# Altium PCB DriverBoard.PcbDoc
Units mil, origin at the board's own origin, x right, y up, seen from the top; angles counter-clockwise.
Board outline 6700 x 1400 mil, 2 copper layers (Top Layer, Bottom Layer); 83 components, 93 nets, 391 pads, 217 vias.
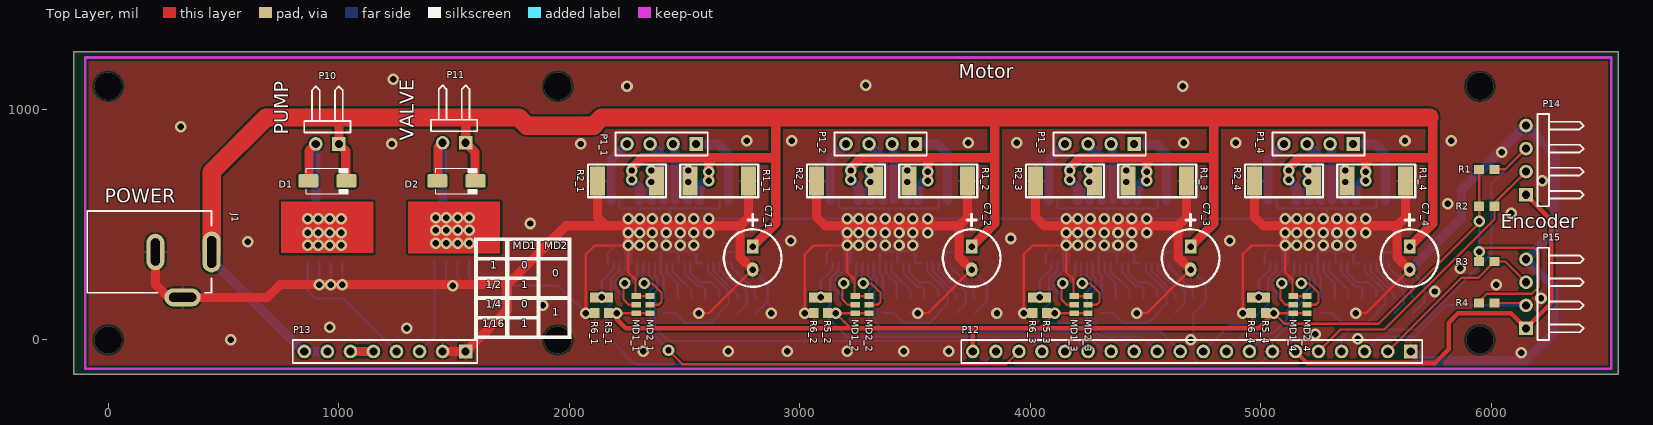
[diagram p0: Top Layer view]
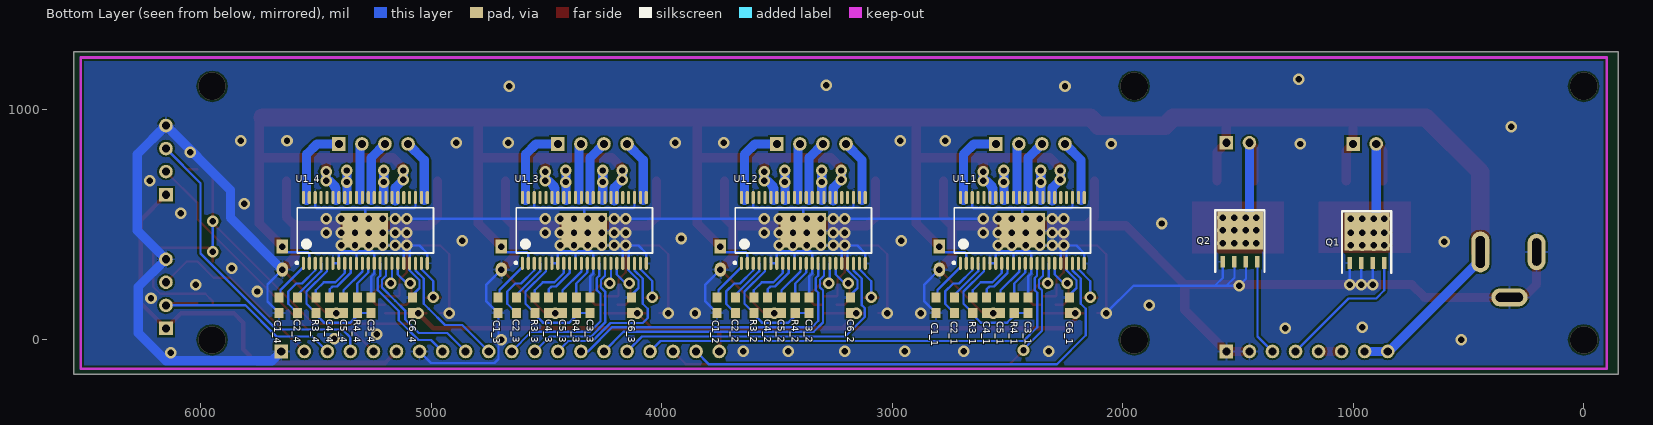
[diagram p1: Bottom Layer view, seen from below]
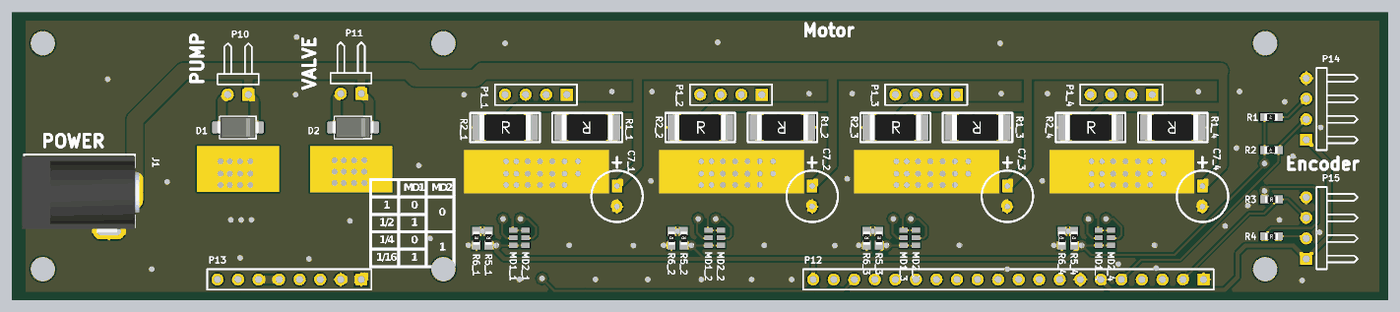
[diagram p2: 3D render of the assembled board from above, using the file's embedded part models]
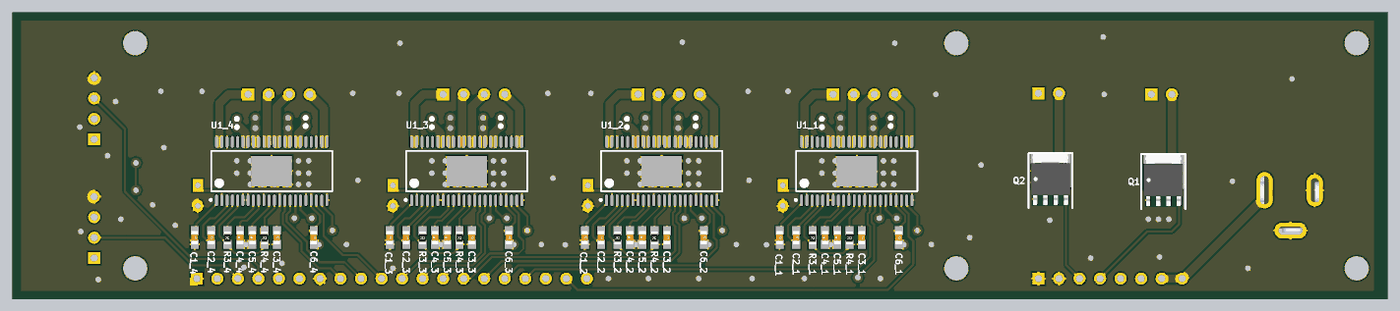
[diagram p3: 3D render of the assembled board from below, using the file's embedded part models]

## Layer stack, top to bottom
Top Layer: signal copper 1.4
Dielectric: dielectric 12.6, FR-4, Dk 4.8
Bottom Layer: signal copper 1.4

## Board outline
-150,1250 -150,-150 6550,-150 6550,1250

## Design rules (kind name [scope] priority, off if disabled: settings)
Clearance [All] p1: gap=8
HoleSize [All] p1: absolutevalues=TRUE maxlimit=196.85 minlimit=11.81 maxpercent=80.000 minpercent=20.000
MinimumSolderMaskSliver [All] p1: minsoldermaskwidth=0
PolygonConnect PolygonConnect_via [All vs IsVia] p1: connectstyle=Direct reliefconductorwidth=10 reliefentries=4 polygonreliefangle="90 Angle"
PolygonConnect [All] p2: connectstyle=Relief reliefconductorwidth=10 reliefentries=4 polygonreliefangle="90 Angle"
RoomDefinition Motor1 [InComponentClass('Motor1')] p1: confinementstyle=ConfineIn formatcopy=TRUE lockcomponents=FALSE outline 2035,65 2955,65 2955,955 2035,955
RoomDefinition Motor4 [InComponentClass('Motor4')] p2: confinementstyle=ConfineIn formatcopy=TRUE lockcomponents=FALSE outline 4885,65 5805,65 5805,955 4885,955
RoomDefinition Motor3 [InComponentClass('Motor3')] p3: confinementstyle=ConfineIn formatcopy=TRUE lockcomponents=FALSE outline 3935,65 4855,65 4855,955 3935,955
RoomDefinition Motor2 [InComponentClass('Motor2')] p4: confinementstyle=ConfineIn formatcopy=TRUE lockcomponents=FALSE outline 2985,65 3905,65 3905,955 2985,955
RoutingVias [All] p1: holewidth=16 width=24 viastyle="Through Hole" minholewidth=28 minwidth=50 maxholewidth=28 maxwidth=50
SilkToSilkClearance [All] p1: silktosilkclearance=0
SilkscreenOverComponentPads [All] p1: minsilkscreentomaskgap=0
SolderMaskExpansion [All] p1: expansion=4
Width [All] p1: maxlimit=100 minlimit=10 preferedwidth=10
24 further rules are at their usual default settings.

## Classes and differential pairs
net class M_STEP[1..4]: M_STEP1 M_STEP2 M_STEP3 M_STEP4
net class M_EN[1..4]: M_EN1 M_EN2 M_EN3 M_EN4
net class M_DIR[1..4]: M_DIR1 M_DIR2 M_DIR3 M_DIR4
component class DriverBoard: D1 D2 J1 P10 P11 P12 P13 P14 P15 Q1 Q2 R1 R2 R3 R4
channel class OneMotor: Motor1 Motor2 Motor3 Motor4
component class Motor4: C1_4 C2_4 C3_4 C4_4 C5_4 C6_4 C7_4 MD1_4 MD2_4 P1_4 R1_4 R2_4 R3_4 R4_4 R5_4 R6_4 U1_4
component class Motor3: C1_3 C2_3 C3_3 C4_3 C5_3 C6_3 C7_3 MD1_3 MD2_3 P1_3 R1_3 R2_3 R3_3 R4_3 R5_3 R6_3 U1_3
component class Motor2: C1_2 C2_2 C3_2 C4_2 C5_2 C6_2 C7_2 MD1_2 MD2_2 P1_2 R1_2 R2_2 R3_2 R4_2 R5_2 R6_2 U1_2
component class Motor1: C1_1 C2_1 C3_1 C4_1 C5_1 C6_1 C7_1 MD1_1 MD2_1 P1_1 R1_1 R2_1 R3_1 R4_1 R5_1 R6_1 U1_1

## Components (designator, comment, footprint, x,y, rotation, side; value= is the part's Value field where it differs from the comment)
C1_1 "Cap Semi" C-1608[0603] 2810,150 r270 bottom (schematic designator C1)
C1_2 "Cap Semi" C-1608[0603] 3760,150 r270 bottom (schematic designator C1)
C1_3 "Cap Semi" C-1608[0603] 4710,150 r270 bottom (schematic designator C1)
C1_4 "Cap Semi" C-1608[0603] 5660,150 r270 bottom (schematic designator C1)
C2_1 "Cap Semi" C-1608[0603] 2730,150 r270 bottom (schematic designator C2)
C2_2 "Cap Semi" C-1608[0603] 3680,150 r270 bottom (schematic designator C2)
C2_3 "Cap Semi" C-1608[0603] 4630,150 r270 bottom (schematic designator C2)
C2_4 "Cap Semi" C-1608[0603] 5580,150 r270 bottom (schematic designator C2)
C3_1 "Cap Semi" C-1608[0603] 2410,150 r270 bottom (schematic designator C3)
C3_2 "Cap Semi" C-1608[0603] 3360,150 r270 bottom (schematic designator C3)
C3_3 "Cap Semi" C-1608[0603] 4310,150 r270 bottom (schematic designator C3)
C3_4 "Cap Semi" C-1608[0603] 5260,150 r270 bottom (schematic designator C3)
C4_1 "Cap Semi" C-1608[0603] 2590,150 r90 bottom (schematic designator C4)
C4_2 "Cap Semi" C-1608[0603] 3540,150 r90 bottom (schematic designator C4)
C4_3 "Cap Semi" C-1608[0603] 4490,150 r90 bottom (schematic designator C4)
C4_4 "Cap Semi" C-1608[0603] 5440,150 r90 bottom (schematic designator C4)
C5_1 "Cap Semi" C-1608[0603] 2530,150 r90 bottom (schematic designator C5)
C5_2 "Cap Semi" C-1608[0603] 3480,150 r90 bottom (schematic designator C5)
C5_3 "Cap Semi" C-1608[0603] 4430,150 r90 bottom (schematic designator C5)
C5_4 "Cap Semi" C-1608[0603] 5380,150 r90 bottom (schematic designator C5)
C6_1 "Cap Semi" C-1608[0603] 2230,150 r270 bottom (schematic designator C6)
C6_2 "Cap Semi" C-1608[0603] 3180,150 r270 bottom (schematic designator C6)
C6_3 "Cap Semi" C-1608[0603] 4130,150 r270 bottom (schematic designator C6)
C6_4 "Cap Semi" C-1608[0603] 5080,150 r270 bottom (schematic designator C6)
C7_1 "50V" RB.1/.25 2795,355 r0 top (schematic designator C7)
C7_2 "50V" RB.1/.25 3745,355 r0 top (schematic designator C7)
C7_3 "50V" RB.1/.25 4695,355 r0 top (schematic designator C7)
C7_4 "50V" RB.1/.25 5645,355 r0 top (schematic designator C7)
D1 "1N5819" DO-214AC 950,690 r0 top
D2 "1N5819" DO-214AC 1510,690 r0 top
J1 "POWER" DC_POWER 200,380 r0 top
MD1_1 "Header 3" shortPad 2290,190 r270 top (schematic designator MD1)
MD1_2 "Header 3" shortPad 3240,190 r270 top (schematic designator MD1)
MD1_3 "Header 3" shortPad 4190,190 r270 top (schematic designator MD1)
MD1_4 "Header 3" shortPad 5140,190 r270 top (schematic designator MD1)
MD2_1 "Header 3" shortPad 2350,190 r270 top (schematic designator MD2)
MD2_2 "Header 3" shortPad 3300,190 r270 top (schematic designator MD2)
MD2_3 "Header 3" shortPad 4250,190 r270 top (schematic designator MD2)
MD2_4 "Header 3" shortPad 5200,190 r270 top (schematic designator MD2)
P1_1 "Motor" HDR1X4 2550,850 r180 top (schematic designator P1)
P1_2 "Motor" HDR1X4 3500,850 r180 top (schematic designator P1)
P1_3 "Motor" HDR1X4 4450,850 r180 top (schematic designator P1)
P1_4 "Motor" HDR1X4 5400,850 r180 top (schematic designator P1)
P10 "Pump" HDR1X2H 1000,850 r180 top
P11 "Valve" HDR1X2H 1550,855 r180 top
P12 "Header 20" HDR1X20 5650,-50 r180 top
P13 "Header 8" HDR1X8 1550,-50 r180 top
P14 "RotaryEncoder1" HDR1X4H 6150,630 r90 top
P15 "RotaryEncoder2" HDR1X4H 6150,50 r90 top
Q1 "PSMN7R0-30YL" SOT669 940,470 r180 bottom
Q2 "PSMN7R0-30YL" SOT669 1490,475 r180 bottom
R1 "Res Semi" R-1608[0603] 5980,740 r180 top
R1_1 "Res Semi" R-6332[2512] 2650,690 r180 top (schematic designator R1)
R1_2 "Res Semi" R-6332[2512] 3600,690 r180 top (schematic designator R1)
R1_3 "Res Semi" R-6332[2512] 4550,690 r180 top (schematic designator R1)
R1_4 "Res Semi" R-6332[2512] 5500,690 r180 top (schematic designator R1)
R2 "Res Semi" R-1608[0603] 5980,580 r180 top
R2_1 "Res Semi" R-6332[2512] 2250,690 r0 top (schematic designator R2)
R2_2 "Res Semi" R-6332[2512] 3200,690 r0 top (schematic designator R2)
R2_3 "Res Semi" R-6332[2512] 4150,690 r0 top (schematic designator R2)
R2_4 "Res Semi" R-6332[2512] 5100,690 r0 top (schematic designator R2)
R3 "Res Semi" R-1608[0603] 5980,340 r0 top
R3_1 "Res Semi" R-1608[0603] 2650,150 r270 bottom (schematic designator R3)
R3_2 "Res Semi" R-1608[0603] 3600,150 r270 bottom (schematic designator R3)
R3_3 "Res Semi" R-1608[0603] 4550,150 r270 bottom (schematic designator R3)
R3_4 "Res Semi" R-1608[0603] 5500,150 r270 bottom (schematic designator R3)
R4 "Res Semi" R-1608[0603] 5980,160 r0 top
R4_1 "Res Semi" R-1608[0603] 2470,150 r270 bottom (schematic designator R4)
R4_2 "Res Semi" R-1608[0603] 3420,150 r270 bottom (schematic designator R4)
R4_3 "Res Semi" R-1608[0603] 4370,150 r270 bottom (schematic designator R4)
R4_4 "Res Semi" R-1608[0603] 5320,150 r270 bottom (schematic designator R4)
R5_1 "Res Semi" R-1608[0603] 2170,150 r90 top (schematic designator R5)
R5_2 "Res Semi" R-1608[0603] 3120,150 r90 top (schematic designator R5)
R5_3 "Res Semi" R-1608[0603] 4070,150 r90 top (schematic designator R5)
R5_4 "Res Semi" R-1608[0603] 5020,150 r90 top (schematic designator R5)
R6_1 "Res Semi" R-1608[0603] 2110,150 r90 top (schematic designator R6)
R6_2 "Res Semi" R-1608[0603] 3060,150 r90 top (schematic designator R6)
R6_3 "Res Semi" R-1608[0603] 4010,150 r90 top (schematic designator R6)
R6_4 "Res Semi" R-1608[0603] 4960,150 r90 top (schematic designator R6)
U1_1 "LV8731" LV8731_V3 2435,475 r90 bottom (schematic designator U1)
U1_2 "LV8731" LV8731_V3 3385,475 r90 bottom (schematic designator U1)
U1_3 "LV8731" LV8731_V3 4335,475 r90 bottom (schematic designator U1)
U1_4 "LV8731" LV8731_V3 5285,475 r90 bottom (schematic designator U1)

## Footprints (in the part's own frame and the unit in brackets; to place one, negate y for a bottom-side part, rotate by r counter-clockwise, add the part's x,y. Pads: shape width x height; smd on the part's side, far side on the other; paste and mask are expansions set on the pad)
C-1608[0603] [mm] "Chip Capacitor; Body 1.6 x 0.8 mm (LxW typ)"
  rect 1.1x1 smd: 1(-0.85,0) 2(0.85,0)
  body extent -0.8,-0.42 0.8,0.38, height 0.29
DC_POWER [mm]
  oval 2x4.5 hole 1 slot 3.5 at 90 deg: 1(6.3,0.036)
  oval 2x4 hole 1 slot 3 at 90 deg: 2(0.1,0.036)
  oval 4x2 hole 1 slot 3 at 0 deg: 3(3.1,-4.964)
  silkscreen extent -7.4,-4.46 6.3,4.54, body extent -7.66,-5.17 6.84,4.33, height 11
DO-214AC [mm] "JEDEC DO214 variation AC. SMA"
  round 0.508 on Mech15: 0(0,0)
  rrect25% 2.2x1.5 smd: 1(-2.1,0) 2(2.1,0)
  silkscreen extent -2.3,-1.4 2.3,1.4, body extent -2.6,-1.3 2.6,1.3, height 2.42
HDR1X2H [mm] "Connector; Header; 2 Position; Right Angle"
  rect 1.5x1.5 hole 0.9: 1(0,0)
  round 1.5 hole 0.9: 2(2.54,0)
  silkscreen extent -1.27,-6.35 3.81,-1.27
HDR1X4 [mm] "Connector; Header; 4 Position"
  rect 1.5x1.5 hole 0.9: 1(0,0)
  round 1.5 hole 0.9: 2(2.54,0) 3(5.08,0) 4(7.62,0)
  silkscreen extent -1.27,-1.27 8.89,1.27
HDR1X4H [mm] "Connector; Header; 4 Position; Right Angle"
  rect 1.5x1.5 hole 0.9: 1(0,0)
  round 1.5 hole 0.9: 2(2.54,0) 3(5.08,0) 4(7.62,0)
  silkscreen extent -1.27,-6.35 8.89,-1.27
HDR1X8 [mm] "Connector; Header; 8 Position"
  rect 1.5x1.5 hole 0.9: 1(0,0)
  round 1.5 hole 0.9: 2(2.54,0) 3(5.08,0) 4(7.62,0) 5(10.16,0) 6(12.7,0) 7(15.24,0) 8(17.78,0)
  silkscreen extent -1.27,-1.27 19.05,1.27
HDR1X20 [mm] "Connector; Header; 20 Position"
  rect 1.5x1.5 hole 0.9: 1(0,0)
  round 1.5 hole 0.9: 2(2.54,0) 3(5.08,0) 4(7.62,0) 5(10.16,0) 6(12.7,0) 7(15.24,0) 8(17.78,0) 9(20.32,0) 10(22.86,0) 11(25.4,0) 12(27.94,0) 13(30.48,0) 14(33.02,0) 15(35.56,0) 16(38.1,0) 17(40.64,0) 18(43.18,0) 19(45.72,0) 20(48.26,0)
  silkscreen extent -1.27,-1.27 49.53,1.27
LV8731_V3 [mm] "SOP, 44-Leads, Body 15.0x5.6mm (max), Pitch 0.65mm, IPC Medium Density"
  oval 1.45x0.35 smd: 1(-3.625,6.825) 2(-3.625,6.175) 3(-3.625,5.525) 4(-3.625,4.875) 5(-3.625,4.225) 6(-3.625,3.575) 7(-3.625,2.925) 8(-3.625,2.275) 9(-3.625,1.625) 10(-3.625,0.975) 11(-3.625,0.325) 12(-3.625,-0.325) 13(-3.625,-0.975) 14(-3.625,-1.625) 15(-3.625,-2.275) 16(-3.625,-2.925) 17(-3.625,-3.575) 18(-3.625,-4.225) 19(-3.625,-4.875) 20(-3.625,-5.525) 21(-3.625,-6.175) 22(-3.625,-6.825) 23(3.625,-6.825) 24(3.625,-6.175) 25(3.625,-5.525) 26(3.625,-4.875) 27(3.625,-4.225) 28(3.625,-3.575) 29(3.625,-2.925) 30(3.625,-2.275) 31(3.625,-1.625) 32(3.625,-0.975) 33(3.625,-0.325) 34(3.625,0.325) 35(3.625,0.975) 36(3.625,1.625) 37(3.625,2.275) 38(3.625,2.925) 39(3.625,3.575) 40(3.625,4.225) 41(3.625,4.875) 42(3.625,5.525) 43(3.625,6.175) 44(3.625,6.825)
  rect 3.8x5 smd: 45(0,0)
  silkscreen extent -3.7,-7.5 2.5,7.68, body extent -2.8,-7.5 2.8,7.5, height 1.7
R-1608[0603] [mm] "Chip Resistor; Body 1.6 x 0.8 mm (LxW typ)"
  rect 1.1x1 smd: 1(-0.85,0) 2(0.85,0)
  body extent -1.27,-0.51 1.33,0.49, height 0.48
R-6332[2512] [mm] "贴片电阻2512 size6.35*3.2mm"
  rect 1.65x3.2 smd: 1(-3.24,0) 2(3.24,0)
  silkscreen extent -4.3,-1.8 4.3,1.8, body extent -3.4,-1.65 3.4,1.65, height 0.6
RB.1/.25 [mil]
  rect 50x62 hole 28: 1(0,50)
  oval 50x62 hole 28: 2(0,-50)
  silkscreen extent -125,-125 125,190
shortPad [mil] "short pad"
  rect 25x40 smd: 1(0,0) 2(37,0) 3(74,0)
SOT669 [mm] "PSMN7R0-30YL  NMOS"
  rect 0.5x1.3 smd: 1(1.905,-3.45) 3(-1.905,-3.45) 3(-0.635,-3.45) 3(0.635,-3.45)
  rect 5x4.2 smd: 2(0,0)
  silkscreen extent -2.75,-4.56 2.67,2.23, body extent -2.49,-4.23 2.41,2.2, height 1.15

## Part data
C1_1 C1_2 C1_3 C1_4 C2_1 C2_2 C2_3 C2_4 C3_1 C3_2 C3_3 C3_4 C4_1 C4_2 C4_3 C4_4 C5_1 C5_2 C5_3 C5_4 C6_1 C6_2 C6_3 C6_4: "Capacitor (Semiconductor SIM Model)"
C7_1 C7_2 C7_3 C7_4: library part "Cap Pol1", "Polarized Capacitor (Radial)"
D1 D2: library part "D Schottky", "Schottky Diode"
J1: library part POWER2.5
MD1_1 MD1_2 MD1_3 MD1_4 MD2_1 MD2_2 MD2_3 MD2_4: "Header, 3-Pin"
P1_1 P1_2 P1_3 P1_4: library part "Header 4", "Header, 4-Pin"
P10 P11: library part "Header 2H", "Header, 2-Pin, Right Angle"
P12: "Header, 20-Pin"
P13: "Header, 8-Pin"
P14 P15: library part "Header 4H", "Header, 4-Pin, Right Angle"
Q1 Q2: library part NMOS-2, "N-Channel Power MOSFET"
R1 R1_1 R1_2 R1_3 R1_4 R2 R2_1 R2_2 R2_3 R2_4 R3 R3_1 R3_2 R3_3 R3_4 R4 R4_1 R4_2 R4_3 R4_4 R5_1 R5_2 R5_3 R5_4 R6_1 R6_2 R6_3 R6_4: "Semiconductor Resistor"

## Via types
v1: diameter 50, hole 28, Top Layer to Bottom Layer, tented both sides, 211 vias
v2: diameter 118.11, hole 118.11, Top Layer to Bottom Layer, 6 vias

## Nets (pads, with @x,y where several pads share a name; then routed paths per layer and width w, separated by ;. In a path a pad name is that pad's centre, name@x,y a point inside that pad or via, vN(x,y) a via of type N, cw(c..) or ccw(c..) an arc to the next point about the centre after c; other vN are vias at no path point)
EMO_1: R3_1.1 U1_1.8 | length 225.1
  Bottom Layer w10: U1_1.8 2524.57,290.43 2565,250 2615,250 2650,215 R3_1.1@2650,188.46
EMO_2: R3_2.1 U1_2.8 | length 225.1
  Bottom Layer w10: U1_2.8 3474.57,290.43 3515,250 3565,250 3600,215 R3_2.1@3600,188.46
EMO_3: R3_3.1 U1_3.8 | length 225.1
  Bottom Layer w10: U1_3.8 4424.57,290.43 4465,250 4515,250 4550,215 R3_3.1@4550,188.46
EMO_4: R3_4.1 U1_4.8 | length 225.1
  Bottom Layer w10: U1_4.8 5374.57,290.43 5415,250 5465,250 5500,215 R3_4.1@5500,188.46
GND: C1_1.2 C1_2.2 C1_3.2 C1_4.2 C3_1.1 C3_2.1 C3_3.1 C3_4.1 C4_1.1 C4_2.1 C4_3.1 C4_4.1 C5_1.1 C5_2.1 C5_3.1 C5_4.1 C6_1.1 C6_2.1 C6_3.1 C6_4.1 C7_1.2 C7_2.2 C7_3.2 C7_4.2 J1.2 J1.3 MD1_1.1 MD1_2.1 MD1_3.1 MD1_4.1 MD2_1.1 MD2_2.1 MD2_3.1 MD2_4.1 P12.1 P12.7 P13.1 P13.2 P14.4 P15.4 Q1.3 Q2.3 R1_1.1 R1_2.1 R1_3.1 R1_4.1 R2_1.1 R2_2.1 R2_3.1 R2_4.1 R6_1.1 R6_2.1 R6_3.1 R6_4.1 U1_1.6 U1_1.7 U1_1.10 U1_1.13 U1_1.18 U1_1.19 U1_1.22 U1_1.25 U1_1.42 U1_1.45 U1_2.6 U1_2.7 U1_2.10 U1_2.13 U1_2.18 U1_2.19 U1_2.22 U1_2.25 U1_2.42 U1_2.45 U1_3.6 U1_3.7 U1_3.10 U1_3.13 U1_3.18 U1_3.19 U1_3.22 U1_3.25 U1_3.42 U1_3.45 U1_4.6 U1_4.7 U1_4.10 U1_4.13 U1_4.18 U1_4.19 U1_4.22 U1_4.25 U1_4.42 U1_4.45 | length 27032.1
  Top Layer w10: R6_1.1 v1(2071.54,116.54) 2071.54,371.54 2110,410 v1(2255,410) 2255,293.74 2287,261.74 2287,193 MD1_1.1 MD2_1.1 ; v1(2561.54,116.54) 2606.54,116.54 C7_1.2 ; R6_2.1 v1(3021.54,116.54) 3021.54,371.54 3060,410 v1(3205,410) 3205,293.74 3237,261.74 3237,193 MD1_2.1 MD2_2.1 ; v1(3511.54,116.54) 3556.54,116.54 C7_2.2 ; R6_3.1 v1(3971.54,116.54) 3971.54,371.54 4010,410 v1(4155,410) 4155,293.74 4187,261.74 4187,193 MD1_3.1 MD2_3.1 ; v1(4461.54,116.54) 4506.54,116.54 C7_3.2 ; R6_4.1 v1(4921.54,116.54) 4921.54,371.54 4960,410 v1(5105,410) 5105,293.74 5137,261.74 5137,193 MD1_4.1 MD2_4.1 ; v1(5411.54,116.54) 5456.54,116.54 C7_4.2
  Top Layer w40: J1.2 203.95,241.05 260.43,184.57 689.57,184.57 745,240 v1(915,240) 1730,240 ; P13.2 P13.1 1730,130 1730,240 ; R2_1.1 2122.44,532.44 2159.88,495 ; v1(2255,410) 2255,495 ; R1_1.1 2777.56,532.56 2740,495 ; C7_1.2 2740,360 2740,495 ; R2_2.1 3072.44,532.44 3109.88,495 3205,495 ; v1(3205,410) 3205,495 ; R1_2.1 3727.56,532.56 3690,495 ; C7_2.2 3690,360 3690,495 ; R2_3.1 4022.44,532.44 4059.88,495 4155,495 ; v1(4155,410) 4155,495 ; R1_3.1 4677.56,532.56 4640,495 ; C7_3.2 4640,360 4640,495 ; R2_4.1 4972.44,532.44 5009.88,495 5105,495 ; v1(5105,410) 5105,495 ; R1_4.1 5627.56,532.56 5590,495 ; C7_4.2 5590,360 5590,495 ; 1730,240 1985,495 2159.88,495 ; 2159.88,495 2255,495 ; 2255,495 2740,495 ; 3205,495 3690,495 ; 4155,495 4640,495 ; 5105,495 5590,495
  Bottom Layer w10: v1(915,240) Q1.3@915,334.17 ; v1(965,240) Q1.3@965,334.17 ; v1(1015,240) Q1.3@1015,334.17 ; Q2.3@1465,339.17 1465,265 v1(1495,235) 1953.07,235 v1(2071.54,116.54) ; Q2.3@1515,339.17 1515,270 1550,235 ; Q2.3@1565,339.17 1565,270 1600,235 ; U1_1.22 2166.3,376.3 2200,410 v1(2255,410) 2370,410 U1_1.45 ; U1_1.25 2217.48,577.52 2225,570 2435,570 ; C6_1.1 2230,195 2200,225 2200,258.74 2245,303.74 U1_1.19@2245,318.95 ; U1_1.19 v1@2243.07,398.07 ; U1_1.18 v1@2268.66,396.34 ; C3_1.1 2410,275 2396.61,288.39 U1_1.13 2396.61,376.61 2405,385 2430,385 ; U1_1.10 2473.39,371.61 ; C5_1.1 v1(2561.54,116.54) C4_1.1 ; U1_1.6 U1_1.7 2550.16,369.84 2535,385 2486.77,385 2473.39,371.61 ; v1(2605,525) v1(3205,525) ; U1_1.42 2652.52,577.52 2645,570 2435,570 ; C7_1.2 2860,240 2860,166.54 C1_1.2 ; U1_2.22 3116.3,376.3 3150,410 v1(3205,410) 3320,410 U1_2.45 ; U1_2.25 3167.48,577.52 3175,570 3385,570 ; C6_2.1 3180,195 3150,225 3150,258.74 3195,303.74 U1_2.19@3195,318.95 ; U1_2.19 v1@3193.07,398.07 ; U1_2.18 v1@3218.66,396.34 ; C3_2.1 3360,275 3346.61,288.39 U1_2.13 3346.61,376.61 3355,385 3380,385 ; U1_2.10 3423.39,371.61 ; C5_2.1 v1(3511.54,116.54) C4_2.1 ; U1_2.6 U1_2.7 3500.16,369.84 3485,385 3436.77,385 3423.39,371.61 ; v1(3555,525) v1(4155,525) ; U1_2.42 3602.52,577.52 3595,570 3385,570 ; C7_2.2 3810,240 3810,166.54 C1_2.2 ; U1_3.22 4066.3,376.3 4100,410 v1(4155,410) 4270,410 U1_3.45 ; U1_3.25 4117.48,577.52 4125,570 4335,570 ; C6_3.1 4130,195 4100,225 4100,258.74 4145,303.74 U1_3.19@4145,318.95 ; U1_3.19 v1@4143.07,398.07 ; U1_3.18 v1@4168.66,396.34 ; C3_3.1 4310,275 4296.61,288.39 U1_3.13 4296.61,376.61 4305,385 4330,385 ; U1_3.10 4373.39,371.61 ; C5_3.1 v1(4461.54,116.54) C4_3.1 ; U1_3.6 U1_3.7 4450.16,369.84 4435,385 4386.77,385 4373.39,371.61 ; v1(4505,525) v1(5105,525) ; U1_3.42 4552.52,577.52 4545,570 4335,570 ; C7_3.2 4760,240 4760,166.54 C1_3.2 4707.47,114.01 4707.47,-82.47 4725,-100 5000,-100 P12.7 ; U1_4.22 5016.3,376.3 5050,410 v1(5105,410) 5220,410 U1_4.45 ; U1_4.25 5067.48,577.52 5075,570 5285,570 ; C6_4.1 5080,195 5050,225 5050,258.74 5095,303.74 U1_4.19@5095,318.95 ; U1_4.19 v1@5093.07,398.07 ; U1_4.18 v1@5118.66,396.34 ; C3_4.1 5260,275 5246.61,288.39 U1_4.13 5246.61,376.61 5255,385 5280,385 ; U1_4.10 5323.39,371.61 ; C5_4.1 v1(5411.54,116.54) C4_4.1 ; U1_4.6 U1_4.7 5400.16,369.84 5385,385 5336.77,385 5323.39,371.61 ; U1_4.42 5502.52,577.52 5495,570 5285,570 ; C7_4.2 5710,240 5710,166.54 C1_4.2 ; 2430,385 2460,385 2473.39,371.61 ; 2430,385 2430,470 U1_1.45 ; U1_1.45 2435,570 ; 3380,385 3410,385 3423.39,371.61 ; 3380,385 3380,470 U1_2.45 ; U1_2.45 3385,570 ; 4330,385 4360,385 4373.39,371.61 ; 4330,385 4330,470 U1_3.45 ; U1_3.45 4335,570 ; 5280,385 5310,385 5323.39,371.61 ; 5280,385 5280,470 U1_4.45 ; U1_4.45 5285,570
  Bottom Layer w40: C7_4.2 5870,530 5870,650 P14.4 6275,805 6275,475 P15.4 6270,230 6270,30 6150,-90 5690,-90 P12.1
  other v1: 6130,-55 2320,-50 2690,-50 2945,-50 3205,-50 3450,-50 3645,-50 530,0 4695,0 5420,5 5235,25 1295,50 960,55 2875,115 3855,115 1885,150 6215,180 5755,210 6020,240 5865,310 2305,410 2360,410 2420,410 2480,410 2540,410 3255,410 3310,410 3370,410 3430,410 3490,410 4205,410 4260,410 4320,410 4380,410 4440,410 5155,410 5210,410 5270,410 5330,410 5390,410 605,425 2960,430 4865,430 3915,440 2255,465 2305,465 2360,465 2420,465 2480,465 2540,465 2605,465 3205,465 3255,465 3310,465 3370,465 3430,465 3490,465 3555,465 4155,465 4205,465 4260,465 4320,465 4380,465 4440,465 4505,465 5105,465 5155,465 5210,465 5270,465 5330,465 5390,465 5455,465 1830,505 2255,525 2305,525 2360,525 2420,525 2480,525 2540,525 3255,525 3310,525 3370,525 3430,525 3490,525 4205,525 4260,525 4320,525 4380,525 4440,525 5155,525 5210,525 5270,525 5330,525 5390,525 5455,525 6085,550 5810,590 6220,690 6045,815 1230,850 2050,850 3730,855 3940,855 4665,855 4890,855 2770,865 2965,865 5625,865 5825,865 315,925 2250,1100 4660,1100 3285,1105 1235,1130
M_DIR1: P12.18 U1_1.15 | length 1985.7
  Top Layer w10: v1(2430,-45) 2490,-105 3895,-105 P12.18
  Bottom Layer w10: U1_1.15 2345.43,278.31 2363,260.74 2363,228 2350,215 2350,40 v1@2430,-40
M_DIR2: P12.15 U1_2.15 | length 1271.7
  Bottom Layer w10: U1_2.15 3295.43,278.31 3313,260.74 3313,228 3300,215 3300,75 3340,35 4165,35 P12.15
M_DIR3: P12.12 U1_3.15 | length 628.5
  Bottom Layer w10: U1_3.15 4245.43,278.31 4263,260.74 4263,228 4245,210 4245,75.46 4305.46,15 4485,15 P12.12
M_DIR4: P12.9 U1_4.15 | length 612.1
  Bottom Layer w10: P12.9 4930,30 5053.19,30 5112.69,89.5 5112.69,127.69 5155,170 5213,228 5213,260.74 5195.43,278.31 U1_4.15
M_EN1: P12.19 U1_1.20 | length 2101.6
  Bottom Layer w10: U1_1.20 2217.48,301.68 2182,266.2 2182,157 2160,135 2160,20 2286.09,-106.09 3793.91,-106.09 P12.19
M_EN2: P12.16 U1_2.20 | length 1346.8
  Bottom Layer w10: U1_2.20 3167.48,301.68 3132,266.2 3132,151 3118,137 3118,100.26 3203.26,15 4085,15 P12.16
M_EN3: P12.13 U1_3.20 | length 711.2
  Bottom Layer w10: U1_3.20 4117.48,301.68 4082,266.2 4082,157 4060,135 4060,95 4082,73 4222,73 4300,-5 4405,-5 P12.13
M_EN4: P12.10 U1_4.20 | length 557.7
  Bottom Layer w10: P12.10 4865,65 4940,65 5010,135 5032,157 5032,266.2 5067.48,301.68 U1_4.20
M_STEP1: P12.17 U1_1.14 | length 2009.5
  Bottom Layer w10: U1_1.14 2371.02,278.17 2381,268.2 2381,216 2370,205 2370,55 2430,-5 4005,-5 P12.17
M_STEP2: P12.14 U1_2.14 | length 1343.1
  Bottom Layer w10: U1_2.14 3321.02,278.17 3331,268.2 3331,216 3320,205 3320,83 3348,55 4214.54,55 4319.54,-50 P12.14
M_STEP3: P12.11 U1_3.14 | length 701.4
  Bottom Layer w10: U1_3.14 4271.02,278.17 4281,268.2 4281,216 4265,200 4265,80.91 4310.91,35 4565,35 P12.11
M_STEP4: P12.8 U1_4.14 | length 535
  Bottom Layer w10: P12.8 5000,0 5055,0 5140,85 5140,125 5231,216 5231,268.2 5221.02,278.17 U1_4.14
MONI_1: R4_1.1 U1_1.12 | length 168.6
  Bottom Layer w10: U1_1.12 2422.2,292.8 2470,245 R4_1.1
MONI_2: R4_2.1 U1_2.12 | length 168.6
  Bottom Layer w10: U1_2.12 3372.2,292.8 3420,245 R4_2.1
MONI_3: R4_3.1 U1_3.12 | length 168.6
  Bottom Layer w10: U1_3.12 4322.2,292.8 4370,245 R4_3.1
MONI_4: R4_4.1 U1_4.12 | length 168.6
  Bottom Layer w10: U1_4.12 5272.2,292.8 5320,245 R4_4.1
NetC1_1_1: C1_1.1 U1_1.1 | length 192.8
  Bottom Layer w10: U1_1.1 2703.7,316.3 2803.27,216.73 2803.27,190.2 C1_1.1
NetC1_2_1: C1_2.1 U1_2.1 | length 192.8
  Bottom Layer w10: U1_2.1 3653.7,316.3 3753.27,216.73 3753.27,190.2 C1_2.1
NetC1_3_1: C1_3.1 U1_3.1 | length 192.8
  Bottom Layer w10: U1_3.1 4603.7,316.3 4703.27,216.73 4703.27,190.2 C1_3.1
NetC1_4_1: C1_4.1 U1_4.1 | length 192.8
  Bottom Layer w10: U1_4.1 5553.7,316.3 5653.27,216.73 5653.27,190.2 C1_4.1
NetC2_1_1: C2_1.1 U1_1.4 | length 191.5
  Bottom Layer w10: U1_1.4 2626.93,298.07 2710,215 2730,195 C2_1.1
NetC2_1_2: C2_1.2 U1_1.3 | length 295.6
  Bottom Layer w10: U1_1.3 2652.52,302.48 2710,245 2735,245 2770,210 2770,156.54 C2_1.2
NetC2_2_1: C2_2.1 U1_2.4 | length 191.5
  Bottom Layer w10: U1_2.4 3576.93,298.07 3660,215 3680,195 C2_2.1
NetC2_2_2: C2_2.2 U1_2.3 | length 295.6
  Bottom Layer w10: U1_2.3 3602.52,302.48 3660,245 3685,245 3720,210 3720,156.54 C2_2.2
NetC2_3_1: C2_3.1 U1_3.4 | length 191.5
  Bottom Layer w10: U1_3.4 4526.93,298.07 4610,215 4630,195 C2_3.1
NetC2_3_2: C2_3.2 U1_3.3 | length 295.6
  Bottom Layer w10: U1_3.3 4552.52,302.48 4610,245 4635,245 4670,210 4670,156.54 C2_3.2
NetC2_4_1: C2_4.1 U1_4.4 | length 191.5
  Bottom Layer w10: U1_4.4 5476.93,298.07 5560,215 5580,195 C2_4.1
NetC2_4_2: C2_4.2 U1_4.3 | length 295.6
  Bottom Layer w10: U1_4.3 5502.52,302.48 5560,245 5585,245 5620,210 5620,156.54 C2_4.2
NetC3_1_2: C3_1.2 R3_1.2 R4_1.2 U1_1.5 | length 547.3
  Bottom Layer w10: C3_1.2 2458.46,116.54 2500,75 2615,75 2650,110 R3_1.2 2690,156.54 2690,209.54 2601.34,298.21 U1_1.5
NetC3_2_2: C3_2.2 R3_2.2 R4_2.2 U1_2.5 | length 547.3
  Bottom Layer w10: C3_2.2 3408.46,116.54 3450,75 3565,75 3600,110 R3_2.2 3640,156.54 3640,209.54 3551.34,298.21 U1_2.5
NetC3_3_2: C3_3.2 R3_3.2 R4_3.2 U1_3.5 | length 547.3
  Bottom Layer w10: C3_3.2 4358.46,116.54 4400,75 4515,75 4550,110 R3_3.2 4590,156.54 4590,209.54 4501.34,298.21 U1_3.5
NetC3_4_2: C3_4.2 R3_4.2 R4_4.2 U1_4.5 | length 547.3
  Bottom Layer w10: C3_4.2 5308.46,116.54 5350,75 5465,75 5500,110 R3_4.2 5540,156.54 5540,209.54 5451.34,298.21 U1_4.5
NetC4_1_2: C4_1.2 U1_1.9 | length 198.5
  Bottom Layer w10: U1_1.9 2498.98,290.57 2557.54,232 2578,232 2590,220 C4_1.2
NetC4_2_2: C4_2.2 U1_2.9 | length 198.5
  Bottom Layer w10: U1_2.9 3448.98,290.57 3507.54,232 3528,232 3540,220 C4_2.2
NetC4_3_2: C4_3.2 U1_3.9 | length 198.5
  Bottom Layer w10: U1_3.9 4398.98,290.57 4457.54,232 4478,232 4490,220 C4_3.2
NetC4_4_2: C4_4.2 U1_4.9 | length 198.5
  Bottom Layer w10: U1_4.9 5348.98,290.57 5407.54,232 5428,232 5440,220 C4_4.2
NetC5_1_2: C5_1.2 U1_1.11 | length 182.9
  Bottom Layer w10: U1_1.11 2447.8,297.2 2530,215 C5_1.2
NetC5_2_2: C5_2.2 U1_2.11 | length 182.9
  Bottom Layer w10: U1_2.11 3397.8,297.2 3480,215 C5_2.2
NetC5_3_2: C5_3.2 U1_3.11 | length 182.9
  Bottom Layer w10: U1_3.11 4347.8,297.2 4430,215 C5_3.2
NetC5_4_2: C5_4.2 U1_4.11 | length 182.9
  Bottom Layer w10: U1_4.11 5297.8,297.2 5380,215 C5_4.2
NetD1_1: D1.1 P10.2 Q1.2 | length 569
  Top Layer w40: D1.1@870,690 870,820 P10.2
  Bottom Layer w40: P10.2 900,510 Q1.2
  other v1: 865,410 910,410 960,410 1010,410 865,465 910,465 960,465 1010,465 865,525 910,525 960,525 1010,525
NetD2_1: D2.1 P11.2 Q2.2 | length 569.9
  Top Layer w40: D2.1@1430,690 1430,835 P11.2
  Bottom Layer w40: P11.2 1450,515 Q2.2
  other v1: 1420,420 1465,420 1515,420 1565,420 1420,475 1465,475 1515,475 1565,475 1420,530 1465,530 1515,530 1565,530
NetMD1_1_2: MD1_1.2 U1_1.17 | length 316.4
  Top Layer w10: v1(2240,245) 2240,255 2245,255 2255,245 2235,245 2235,175 2258,152 MD1_1.2@2290,152
  Bottom Layer w10: v1(2240,245) 2240,255 2250,245 2255,245 2294.25,284.25 U1_1.17
NetMD1_2_2: MD1_2.2 U1_2.17 | length 316.4
  Top Layer w10: v1(3190,245) 3190,255 3195,255 3205,245 3185,245 3185,175 3208,152 MD1_2.2@3240,152
  Bottom Layer w10: v1(3190,245) 3190,255 3200,245 3205,245 3244.25,284.25 U1_2.17
NetMD1_3_2: MD1_3.2 U1_3.17 | length 316.4
  Top Layer w10: v1(4140,245) 4140,255 4145,255 4155,245 4135,245 4135,175 4158,152 MD1_3.2@4190,152
  Bottom Layer w10: v1(4140,245) 4140,255 4150,245 4155,245 4194.25,284.25 U1_3.17
NetMD1_4_2: MD1_4.2 U1_4.17 | length 316.4
  Top Layer w10: v1(5090,245) 5090,255 5095,255 5105,245 5085,245 5085,175 5108,152 MD1_4.2@5140,152
  Bottom Layer w10: v1(5090,245) 5090,255 5100,245 5105,245 5144.25,284.25 U1_4.17
NetMD2_1_2: MD2_1.2 U1_1.16 | length 276.4
  Top Layer w10: v1(2325,245) 2360,245 2400,205 2400,165 2387,152 MD2_1.2@2350,152
  Bottom Layer w10: U1_1.16 2319.84,250.16 v1(2325,245)
NetMD2_2_2: MD2_2.2 U1_2.16 | length 276.4
  Top Layer w10: v1(3275,245) 3310,245 3350,205 3350,165 3337,152 MD2_2.2@3300,152
  Bottom Layer w10: U1_2.16 3269.84,250.16 v1(3275,245)
NetMD2_3_2: MD2_3.2 U1_3.16 | length 276.4
  Top Layer w10: v1(4225,245) 4260,245 4300,205 4300,165 4287,152 MD2_3.2@4250,152
  Bottom Layer w10: U1_3.16 4219.84,250.16 v1(4225,245)
NetMD2_4_2: MD2_4.2 U1_4.16 | length 276.4
  Top Layer w10: v1(5175,245) 5210,245 5250,205 5250,165 5237,152 MD2_4.2@5200,152
  Bottom Layer w10: U1_4.16 5169.84,250.16 v1(5175,245)
NetP1_1_1: P1_1.1 U1_1.43 U1_1.44 | length 358.6
  Bottom Layer w40: P1_1.1 2645,850 2690,805 2690,605
NetP1_1_2: P1_1.2 U1_1.34 U1_1.35 | length 246.3
  Bottom Layer w40: P1_1.2 2458,842 2458,607
NetP1_1_3: P1_1.3 U1_1.32 U1_1.33 | length 269.9
  Bottom Layer w40: P1_1.3 2410,790 2410,605
NetP1_1_4: P1_1.4 U1_1.23 U1_1.24 | length 274
  Bottom Layer w40: 2180,605 2180,780 P1_1.4
NetP1_2_1: P1_2.1 U1_2.43 U1_2.44 | length 358.6
  Bottom Layer w40: P1_2.1 3595,850 3640,805 3640,605
NetP1_2_2: P1_2.2 U1_2.34 U1_2.35 | length 246.3
  Bottom Layer w40: P1_2.2 3408,842 3408,607
NetP1_2_3: P1_2.3 U1_2.32 U1_2.33 | length 269.9
  Bottom Layer w40: P1_2.3 3360,790 3360,605
NetP1_2_4: P1_2.4 U1_2.23 U1_2.24 | length 274
  Bottom Layer w40: 3130,605 3130,780 P1_2.4
NetP1_3_1: P1_3.1 U1_3.43 U1_3.44 | length 358.6
  Bottom Layer w40: P1_3.1 4545,850 4590,805 4590,605
NetP1_3_2: P1_3.2 U1_3.34 U1_3.35 | length 246.3
  Bottom Layer w40: P1_3.2 4358,842 4358,607
NetP1_3_3: P1_3.3 U1_3.32 U1_3.33 | length 269.9
  Bottom Layer w40: P1_3.3 4310,790 4310,605
NetP1_3_4: P1_3.4 U1_3.23 U1_3.24 | length 274
  Bottom Layer w40: 4080,605 4080,780 P1_3.4
NetP1_4_1: P1_4.1 U1_4.43 U1_4.44 | length 358.6
  Bottom Layer w40: P1_4.1 5495,850 5540,805 5540,605
NetP1_4_2: P1_4.2 U1_4.34 U1_4.35 | length 246.3
  Bottom Layer w40: P1_4.2 5308,842 5308,607
NetP1_4_3: P1_4.3 U1_4.32 U1_4.33 | length 269.9
  Bottom Layer w40: P1_4.3 5260,790 5260,605
NetP1_4_4: P1_4.4 U1_4.23 U1_4.24 | length 274
  Bottom Layer w40: 5030,605 5030,780 P1_4.4
NetP12_2: P12.2 P15.3 R3.2 | length 798.8
  Top Layer w10: P12.2 5870,270 5943.46,270 R3.2 6060,340 P15.3
NetP12_3: P12.3 P15.2 R4.2 | length 923.5
  Top Layer w10: R4.2 6140,160 P15.2
  Bottom Layer w10: P12.3 5515,15 5670,15 5805,150 P15.2
NetP12_4: P12.4 P14.3 R1.1 | length 1552.1
  Top Layer w10: R1.1 6060,740 P14.3
  Bottom Layer w10: P12.4 5350,10 5385,45 5670,45 6000,375 6000,680 P14.3
NetP12_5: P12.5 P14.2 R2.1 | length 1277.6
  Top Layer w10: P12.5 5345,45 5535,45 6013.46,523.46 R2.1@6013.46,593.46 ; R2.1 R2.1@6013.46,593.46 ; P14.2 R2.1@6013.46,593.46
NetP12_6: P12.6 P14.1 P15.1 | length 1875.2
  Top Layer w20: P12.6 5200,-100 5755,-100 5815,-40 5815,75 5855,115 6085,115 P15.1 6260,160 6260,520 P14.1
NetP13_3: P13.3 Q2.1 | length 416.1
  Bottom Layer w10: P13.3 1415,15 Q2.1
NetP13_4: P13.4 Q1.1 | length 613.9
  Bottom Layer w10: Q1.1 865,215 900,180 1020,180 P13.4
NetR1_1_2: R1_1.2 U1_1.36 U1_1.37 | length 130
  Bottom Layer w40: 2515,605 v1(2515,735)
  other v1: 2515,685
NetR1_2_2: R1_2.2 U1_2.36 U1_2.37 | length 130
  Bottom Layer w40: 3465,605 v1(3465,735)
  other v1: 3465,685
NetR1_3_2: R1_3.2 U1_3.36 U1_3.37 | length 130
  Bottom Layer w40: 4415,605 v1(4415,735)
  other v1: 4415,685
NetR1_4_2: R1_4.2 U1_4.36 U1_4.37 | length 130
  Bottom Layer w40: 5365,605 v1(5365,735)
  other v1: 5365,685
NetR2_1_2: R2_1.2 U1_1.30 U1_1.31 | length 130
  Bottom Layer w40: 2355,605 v1(2355,735)
  other v1: 2355,685
NetR2_2_2: R2_2.2 U1_2.30 U1_2.31 | length 130
  Bottom Layer w40: 3305,605 v1(3305,735)
  other v1: 3305,685
NetR2_3_2: R2_3.2 U1_3.30 U1_3.31 | length 130
  Bottom Layer w40: 4255,605 v1(4255,735)
  other v1: 4255,685
NetR2_4_2: R2_4.2 U1_4.30 U1_4.31 | length 130
  Bottom Layer w40: 5205,605 v1(5205,735)
  other v1: 5205,685
V5: P13.5 P13.6 | length 100
  Top Layer w40: P13.6 P13.5
V24: C7_1.1 C7_2.1 C7_3.1 C7_4.1 D1.2 D2.2 J1.1 P10.1 P11.1 P13.7 P13.8 U1_1.2 U1_1.28 U1_1.29 U1_1.38 U1_1.39 U1_2.2 U1_2.28 U1_2.29 U1_2.38 U1_2.39 U1_3.2 U1_3.28 U1_3.29 U1_3.38 U1_3.39 U1_4.2 U1_4.28 U1_4.29 U1_4.38 U1_4.39 | length 14544.7
  Top Layer w40: 1000,965 P10.1 1030,820 D1.2@1030,690 ; 1550,965 P11.1 1590,815 D2.2@1590,690 ; v1(2270,695) 2270,745 2315,790 2625,790 ; v1(2605,690) 2605,770 2625,790 ; C7_1.1 2895,505 2895,985 ; 2895,790 2625,790 ; v1(3220,695) 3220,745 3265,790 3575,790 ; v1(3555,690) 3555,770 3575,790 ; C7_2.1 3845,505 3845,985 ; 3845,790 3575,790 ; v1(4170,695) 4170,745 4215,790 4525,790 ; v1(4505,690) 4505,770 4525,790 ; C7_3.1 4795,505 4795,965 ; 4795,790 4525,790 ; v1(5120,695) 5120,745 5165,790 5475,790 ; v1(5455,690) 5455,770 5475,790 ; C7_4.1 5745,505 5745,980 ; 5745,790 5475,790
  Top Layer w80: J1.1 448.05,728.05 685,965 1780,965 1815,930 2105,930 2140,965 5730,965
  Bottom Layer w10: U1_1.2 2678.11,373.11 2685,380 2770,380 C7_1.1 ; U1_2.2 3628.11,373.11 3635,380 3720,380 C7_2.1 ; U1_3.2 4578.11,373.11 4585,380 4670,380 C7_3.1 ; U1_4.2 5528.11,373.11 5535,380 5620,380 C7_4.1
  Bottom Layer w40: J1.1@447.5,347.5 845,-50 P13.7 ; v1(2270,735) v1(2270,695) 2305,660 2305,603 ; 2563,605 2563,658.05 2568,663.05 2568,668 2590,690 v1(2605,690) v1(2605,730) ; v1(3220,735) v1(3220,695) 3255,660 3255,603 ; 3513,605 3513,658.05 3518,663.05 3518,668 3540,690 v1(3555,690) v1(3555,730) ; v1(4170,735) v1(4170,695) 4205,660 4205,603 ; 4463,605 4463,658.05 4468,663.05 4468,668 4490,690 v1(4505,690) v1(4505,730) ; v1(5120,735) v1(5120,695) 5155,660 5155,603 ; 5413,605 5413,658.05 5418,663.05 5418,668 5440,690 v1(5455,690) v1(5455,730)
V33: C6_1.2 C6_2.2 C6_3.2 C6_4.2 MD1_1.3 MD1_2.3 MD1_3.3 MD1_4.3 MD2_1.3 MD2_2.3 MD2_3.3 MD2_4.3 P12.20 R1.2 R2.2 R3.1 R4.1 R5_1.1 R5_2.1 R5_3.1 R5_4.1 | length 6148.2
  Top Layer w10: R5_1.1 2170.54,116 v1(2206,116) MD2_1.3 ; R5_2.1 3120.54,116 v1(3156,116) ; 3220,52 v1(3156,116) ; MD2_2.3 v1(3156,116) ; 4040,50 v1(4106,116) ; R5_3.1 4070.54,116 v1(4106,116) ; MD2_3.3 v1(4106,116) ; R5_4.1 5020.54,116 v1(5056,116) ; MD2_4.3 v1(5056,116) ; R4.1 5946.54,166.54 5980,200 6175,200 6205,230 6205,380 6185,400 5965,400 v1(5946.54,381.54) R3.1 ; v1(5946.54,515) v1@5946.54,506.54 ; R1.2 v1@5946.54,506.54 ; v1(5056,116) 5102,70 5510,70 v1@5946.54,506.54
  Top Layer w20: v1(2206,116) 2206,89 2245,50 4990,50 v1(5056,116) ; P12.20 3750,50
  Bottom Layer w10: v1(5946.54,381.54) v1(5946.54,515)
VREF_1: R5_1.2 R6_1.2 U1_1.21 | length 228.8
  Top Layer w10: R6_1.2 R5_1.2
  Bottom Layer w10: v1(2140,185) 2140,255 2191.89,306.89 U1_1.21
VREF_2: R5_2.2 R6_2.2 U1_2.21 | length 228.8
  Top Layer w10: R6_2.2 R5_2.2
  Bottom Layer w10: v1(3090,185) 3090,255 3141.89,306.89 U1_2.21
VREF_3: R5_3.2 R6_3.2 U1_3.21 | length 228.8
  Top Layer w10: R6_3.2 R5_3.2
  Bottom Layer w10: v1(4040,185) 4040,255 4091.89,306.89 U1_3.21
VREF_4: R5_4.2 R6_4.2 U1_4.21 | length 228.8
  Top Layer w10: R6_4.2 R5_4.2
  Bottom Layer w10: v1(4990,185) 4990,255 5041.89,306.89 U1_4.21
pads on no net: D1.0 D2.0 U1_1.26 U1_1.27 U1_1.40 U1_1.41 U1_2.26 U1_2.27 U1_2.40 U1_2.41 U1_3.26 U1_3.27 U1_3.40 U1_3.41 U1_4.26 U1_4.27 U1_4.40 U1_4.41
copper on no net:
  other v2: 0,0 1950,0 5950,0 0,1100 1950,1100 5950,1100

## Polygon pours and split planes (outlines as drawn)
GND on Top Layer "GND" (solid, remove dead copper, pour order 1000): -100,1225 -100,-125 6520,-125 6520,1225
GND on Bottom Layer "GND" (solid, remove dead copper, pour order 1001): -100,1225 -100,-125 6520,-125 6520,1225

## Keep-outs
Keep-Out Layer:
  lines w11.81: -100,-125 -100,1225 6520,1225 6520,-125 -100,-125

## Other copper
Top Layer:
  rectangle net NetD2_1: 1300,375 1700,600
  rectangle net NetD1_1: 750,376.34 1150,600

## Silkscreen, mask and mechanical layers (free items; w line width, h text height)
Top Overlay:
  region: 1590,443.07 1603.34,443.07 1603.34,5.44 1590,5.44
  region: 1725.03,429.76 1738.37,429.76 1738.37,5.44 1725.03,5.44
  region: 1860.07,429.76 1873.4,429.76 1873.4,5.44 1860.07,5.44
  region: 1995.1,429.76 2008.44,429.76 2008.44,5.44 1995.1,5.44
  region: 1603.34,443.07 2008.44,443.07 2008.44,429.76 1603.34,429.76
  region: 1603.34,358.21 2008.44,358.21 2008.44,344.89 1603.34,344.89
  region: 1603.34,273.34 1873.4,273.34 1873.4,260.03 1603.34,260.03
  region: 1603.34,188.48 2008.44,188.48 2008.44,175.16 1603.34,175.16
  region: 1603.34,103.61 1873.4,103.61 1873.4,90.3 1603.34,90.3
  region: 1603.34,18.75 2008.44,18.75 2008.44,5.44 1603.34,5.44
  lines w1.67: 1590,5.44 1590,443.07 ; 1603.34,18.75 2008.44,18.75 ; 1603.34,103.61 1873.4,103.61 ; 1603.34,188.48 2008.44,188.48 ; 1603.34,273.34 1873.4,273.34 ; 1603.34,358.21 2008.44,358.21 ; 1603.34,443.07 2008.44,443.07 ; 1725.03,5.44 1725.03,429.76 ; 1860.07,5.44 1860.07,429.76 ; 1995.1,5.44 1995.1,429.76
  text "Motor" at 3690,1135 h60
  text "PUMP" at 780,890 h60 r90
  text "VALVE" at 1325,865 h60 r90
  text "POWER" at -15,595 h60
  text "Encoder" at 6040,485 h60
  text "M" at 1755.04,380.63 h58.11
  text "D" at 1794.98,380.63 h58.11
  text "1" at 1826.59,380.63 h58.11
  text "M" at 1890.07,380.63 h58.11
  text "D" at 1930.01,380.63 h58.11
  text "2" at 1961.63,380.63 h58.11
  text "1" at 1656.68,295.76 h58.11
  text "0" at 1791.72,295.76 h58.11
  text "0" at 1926.75,260.82 h58.11
  text "1" at 1636.68,210.9 h58.11
  text "/" at 1664.97,210.9 h58.11
  text "2" at 1676.61,210.9 h58.11
  text "1" at 1791.72,210.9 h58.11
  text "1" at 1636.68,126.03 h58.11
  text "/" at 1664.97,126.03 h58.11
  text "4" at 1676.61,126.03 h58.11
  text "0" at 1791.72,126.03 h58.11
  text "1" at 1926.75,91.09 h58.11
  text "1" at 1621.67,41.17 h58.11
  text "/" at 1649.96,41.17 h58.11
  text "1" at 1661.61,41.17 h58.11
  text "6" at 1689.9,41.17 h58.11
  text "1" at 1791.72,41.17 h58.11
Top Solder:
  rectangle: 2050,370 2755,580
  rectangle: 3000,370 3705,580
  rectangle: 4900,370 5605,580
  rectangle: 1300,375 1700,600
  rectangle: 750,375 1150,600
  rectangle: 3950,370 4655,580